# EAGLE board smartcard (EAGLE 6.6.0)
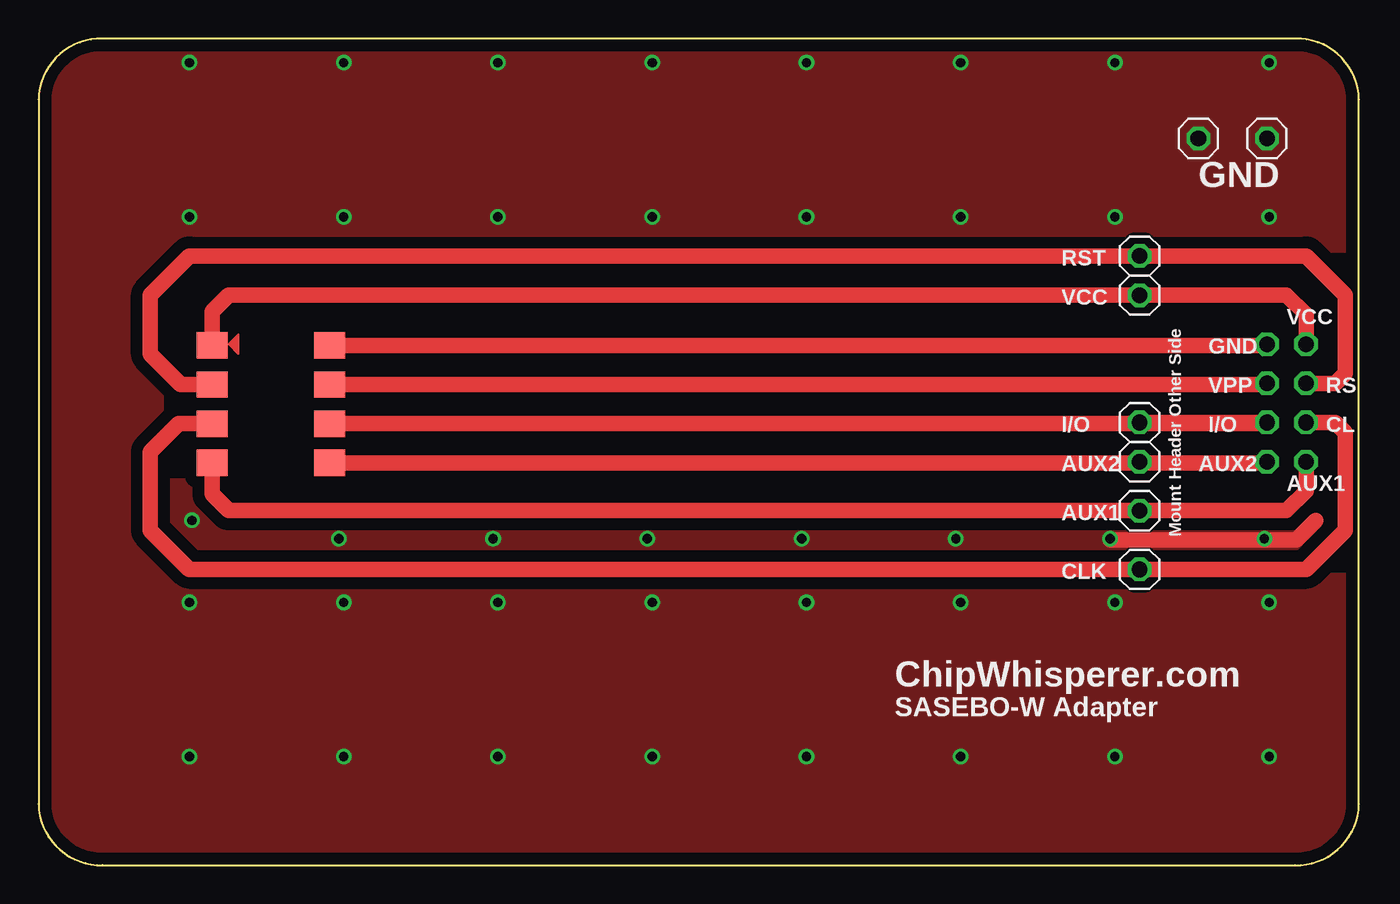
[diagram p0: board, top side]
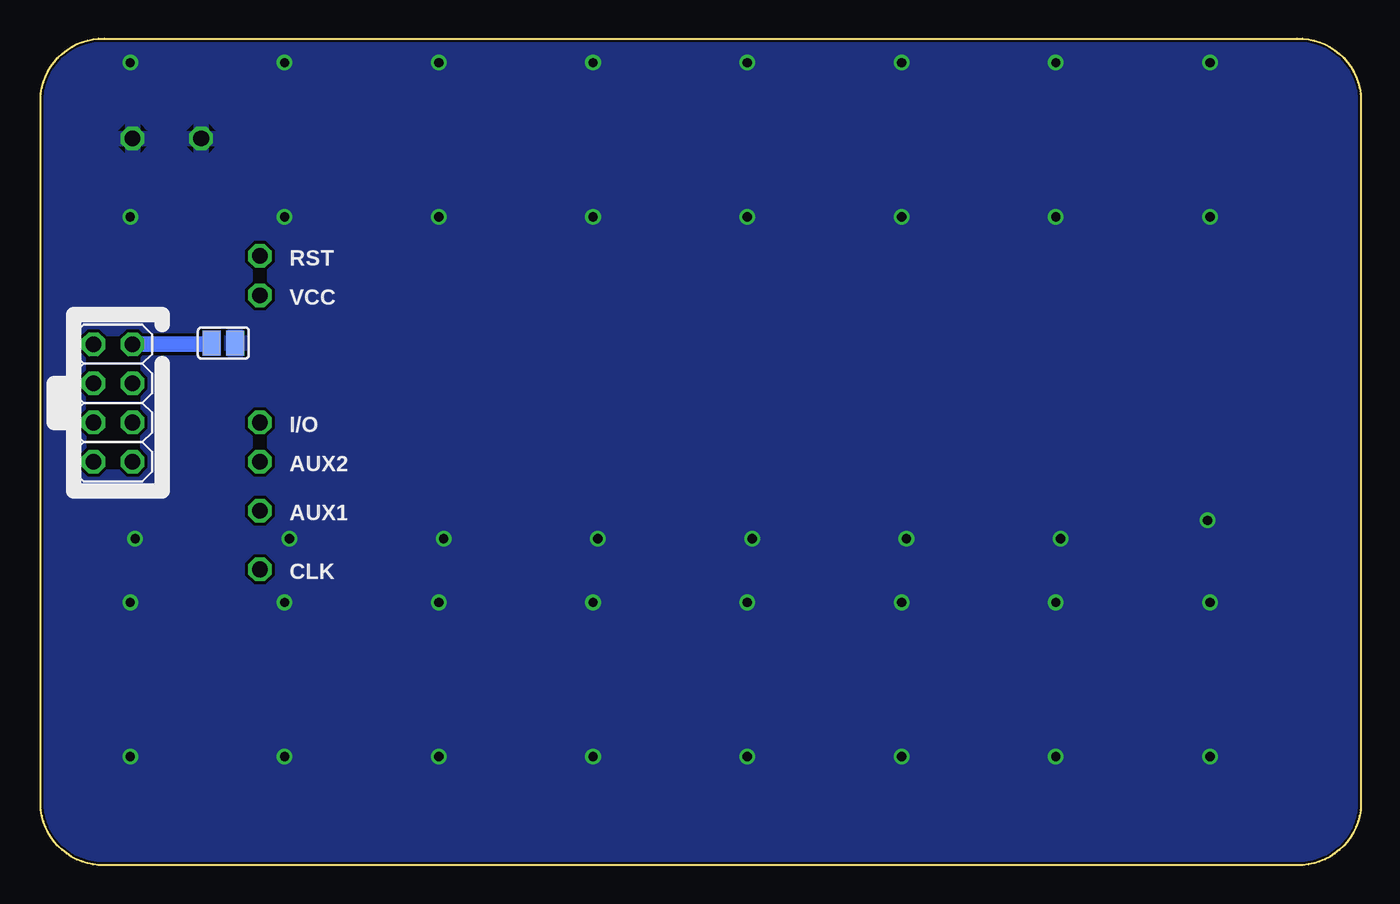
[diagram p1: board, bottom side, seen from below]

Size 85.6 x 53.6 mm. Coordinates in mm from the lower left corner, seen from the top.
Copper layers (1*16): Top 0.035mm / dielectric 1.5mm / Bottom 0.035mm
Design rules "default *": minimum track width 10mil, minimum drill 24mil, track to track 8mil, track to pad 8mil, pad to pad 8mil, via to via 8mil, smd to smd 8mil, copper to edge 5mil, drill to drill 8mil, minimum pad ring 10mil, minimum via ring 8mil, stop-mask expansion 4mil, vias tented up to drill 50mil, thermal gap 10mil
tRestrict: area 12.3,24.3 to 18.7,35.7

## Footprints (pad centres in the part's own frame; a part is rotated, then mirrored left to right if it is on the bottom)
ISO7816 = smd 2 x 1.7: P$1 -31.55,6.91; P$2 -31.55,4.37; P$3 -31.55,1.83; P$4 -31.55,-0.71; P$5 -23.93,6.91; P$6 -23.93,4.37; P$7 -23.93,1.83; P$8 -23.93,-0.71
2X04 = drill 1.016 octagon: 1 -3.81,-1.27; 2 -3.81,1.27; 3 -1.27,-1.27; 4 -1.27,1.27; 5 1.27,-1.27; 6 1.27,1.27; 7 3.81,-1.27; 8 3.81,1.27
SJ-NC = smd 1.168 x 1.6: 1 -0.762,0; 2 0.762,0
1X01 = drill 1.016 octagon: 1 0,0

## Placement (x,y rotation side)
E$1  [ISO7816]  42.8,26.8 0 top
E$2  [2X04]  80.9,29.97 90 bottom
E$3  [SJ-NC]  73.75,33.86 0 bottom
E$4  [1X01]  79.63,47.12 0 top
E$5  [1X01]  71.38,28.7 0 top
E$6  [1X01]  75.19,47.12 0 top
E$7  [1X01]  71.38,19.18 0 top
E$8  [1X01]  71.38,36.96 0 top
E$9  [1X01]  71.38,39.5 0 top
E$10  [1X01]  71.38,22.99 0 top
E$11  [1X01]  71.38,26.16 0 top

## Library data of the parts
E$1 = smartwed
E$2 E$4-E$11 = pinhead
E$3 = SparkFun

## Nets
GND: E$3.2 E$4.1 E$6.1
S$1: E$1.P$1 E$2.8 E$8.1
S$2: E$1.P$5 E$2.7
S$3: E$1.P$6 E$2.5
S$4: E$1.P$7 E$2.3 E$5.1
S$5: E$1.P$8 E$2.1
S$6: E$1.P$2 E$2.6 E$9.1
S$8: E$1.P$3 E$2.4
S$9: E$1.P$4 E$2.2

## Tracks (layer width: path | path; a pad name or v marks a point on that pad's centre or on a via)
GND  (via drill 0.6)
  Top 1.016: 69.47,21.09 81.53,21.09 82.81,22.36
  other vias: 9.78,42.04 19.78,42.04 29.78,42.04 39.78,42.04 49.78,42.04 59.78,42.04 69.78,42.04 79.78,42.04 9.78,17.04 19.78,17.04 29.78,17.04 39.78,17.04 49.78,17.04 59.78,17.04 69.78,17.04 79.78,17.04 79.78,7.04 69.78,7.04 59.78,7.04 49.78,7.04 39.78,7.04 29.78,7.04 19.78,7.04 9.78,7.04 9.78,52.04 19.78,52.04 29.78,52.04 39.78,52.04 49.78,52.04 59.78,52.04 69.78,52.04 79.78,52.04 9.94,22.36 19.46,21.17 29.46,21.17 39.46,21.17 49.46,21.17 59.46,21.17 69.47,21.17 79.47,21.17
  pour Bottom: 0.89,53.47 83.44,53.47 85.98,50.93 85.98,1.4 83.44,-1.14 2.16,-1.14 -0.38,1.4 -0.38,52.2
  pour Top (isolate 0.762, no thermals): 4.7,53.47 82.17,53.47 arc-90 85.98,49.66 85.98,3.94 arc-90 82.17,0.13 4.7,0.13 arc-90 -0.38,5.21 -0.38,48.39 arc-90
S$1
  Top 1.016: E$1.P$1 11.25,35.89 12.32,36.96 | 12.32,36.96 E$8.1 | E$2.8 82.17,35.69 80.9,36.96 80.26,36.96 E$8.1 | 12.32,36.96 E$8.1
S$2
  Top 1.016: E$1.P$5 79.56,33.71 E$2.7
  Bottom 1.016: E$2.7 74.55,33.78
S$3
  Top 1.016: E$1.P$6 79.56,31.17 E$2.5
S$4
  Top 1.016: E$1.P$7 79.56,28.63 E$2.3 E$5.1
S$5
  Top 1.016: E$1.P$8 79.56,26.09 E$2.1
S$6
  Top 1.016: E$2.6 84.07,31.24 84.71,31.88 84.71,36.96 82.17,39.5 E$9.1 9.78,39.5 7.24,36.96 7.24,33.15 9.22,31.17 E$1.P$2
S$8
  Top 1.016: E$1.P$3 9.07,28.63 7.24,26.8 7.24,21.72 9.78,19.18 82.17,19.18 84.71,21.72 84.71,28.07 84.07,28.7 E$2.4
S$9
  Top 1.016: E$1.P$4 11.25,24.06 12.32,22.99 80.9,22.99 82.17,24.26 E$2.2

## Text on the board
tPlace: GND | RST | VCC | VCC | GND | VPP | RS | I/O | I/O | CL | AUX2 | AUX2 | AUX1 | AUX1 | Mount Header Other Side | CLK | ChipWhisperer.com | SASEBO-W Adapter
bPlace: RST | VCC | I/O | AUX2 | AUX1 | CLK